# Altium PCB Main_PCB.PcbDoc
Units mm, origin at the board's own origin, x right, y up, seen from the top; angles counter-clockwise.
Board outline 160 x 100 mm, 2 copper layers (Top Layer, Bottom Layer), stack 1.569 mm thick; 46 components, 26 nets, 123 pads, 0 vias.
Unrouted connection lines stored in the file: 96.
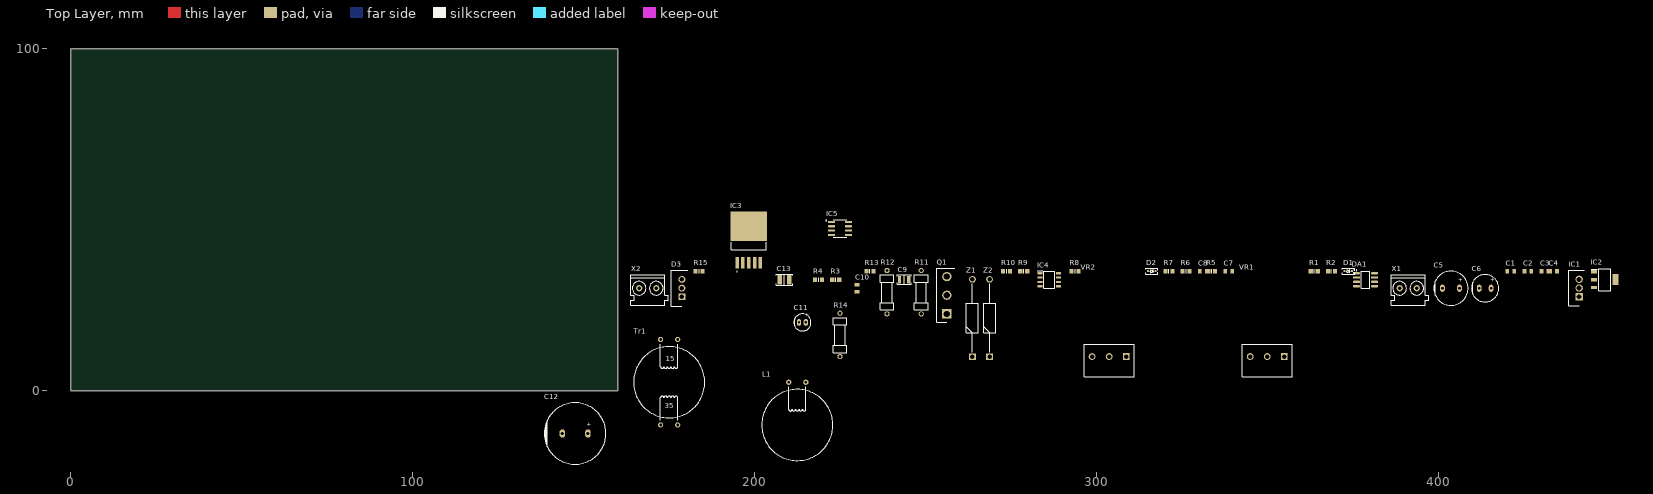
[diagram p0: Top Layer view]
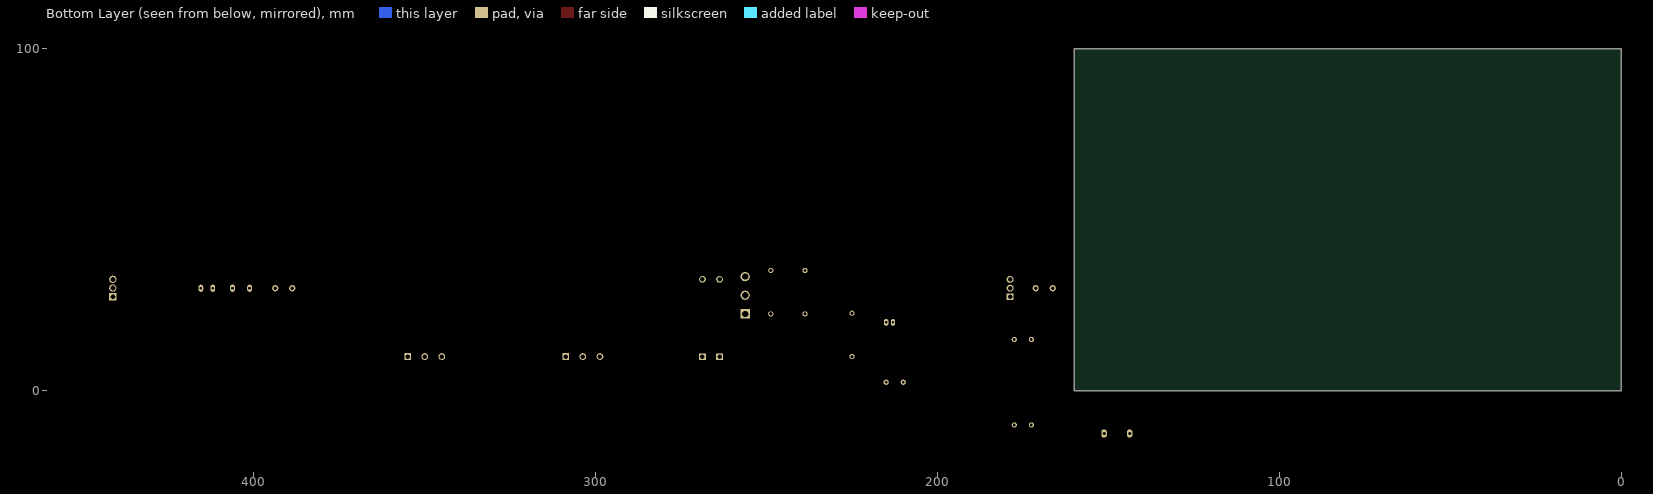
[diagram p1: Bottom Layer view, seen from below]

## Layer stack, top to bottom
Top Solder: solder mask 0.01, Solder Resist, Dk 3.5
Top Layer: signal copper 0.035
Dielectric 1: core 1.4986, Core-043, Dk 4.3
Bottom Layer: signal copper 0.035
Bottom Solder: solder mask 0.01, Solder Resist, Dk 3.5

## Board outline
0,0 0,100 160,100 160,0

## Design rules (kind name [scope] priority, off if disabled: settings)
Clearance [All] p1: gap=0.254 ignorepadtopadclearanceinfootprint=FALSE except(0: Arc-Hole Track-Hole SMDPad-Hole THPad-Hole Via-Hole Fill-Hole Poly-Hole Region-Hole Text-Hole)
PolygonConnect [All] p1: connectstyle=Relief reliefconductorwidth=0.254 reliefentries=4 polygonreliefangle="90 Angle" airgapwidth=0.254
RoutingVias [All] p1: holewidth=0.711 width=1.27 viastyle="Through Hole" minholewidth=0.711 minwidth=1.27 maxholewidth=0.711 maxwidth=1.27
SolderMaskExpansion [All] p1: expansion=0.102 istentingtop=FALSE
Width [All] p1: maxlimit=0.254 minlimit=0.254 preferedwidth=0.254
30 further rules are at their usual default settings.

## Components (designator, comment, footprint, x,y, rotation, side; value= is the part's Value field where it differs from the comment)
C1 "0,1 мкФ" CAPC2012L-С0805 421.25,35 r0 top
C2 "0,1 мкФ" CAPC2012L-С0805 426.25,35 r0 top
C3 "0,1 мкФ" CAPC2012L-С0805 431.25,35 r0 top
C4 "0,1 мкФ" CAPC2012L-С0805 433.75,35 r0 top
C5 "470µF" "CAP TH ALUM ELEC D10.00mm S5.00mm H10.50mm" 403.75,30 r0 top
C6 "100µF" "CAP TH ALUM ELEC D8.00mm S3.50mm H12.50mm" 413.75,30 r0 top
C7 "0,1 мкФ" CAPC2012L-С0805 338.75,35 r0 top
C8 "0,1 мкФ" CAPC2012L-С0805 331.25,35 r0 top
C9 "1 µF" "CAP FILM 1210" 243.75,32.5 r0 top
C10 "0,1 мкФ" CAPC2012L-С0805 230,30 r90 top
C11 "10µF" "CAP TH ALUM ELEC D5.00mm S2.00mm H11.00mm" 214,20 r0 top
C12 "2200µF" "CAP TH ALUM ELEC D18.00mm S7.50mm H42.00mm" 147.5,-12.5 r0 top
C13 "0.1 µF" "CAP 1210_3225 - 1MM" 208.75,32.5 r0 top
D1 "1N4148WS" SOD323F 373.75,35 r0 top
D2 "1N4148WS" SOD323F 316.25,35 r0 top
D3 "MBR40250TG" TO254P483X1010X2035-3P 178.75,27.5 r90 top
DA1 "LM358" SOIC127P600-8BM 378.75,32.5 r0 top
IC1 "L7815CP" TO255P460X1020X2030-3P 441.25,27.5 r90 top
IC2 "LM7805MPX_NOPB" SOT230P700X180-4N 448.75,32.5 r0 top
IC3 "LM2576" LM2576 198.3,48.1 r90 top
IC4 "ACS712ELCTR-05B-T" SOIC127P600X175-8N 286.25,32.5 r0 top
IC5 "UCC27322" SOIC127P599X175-8N 225,47.5 r0 top
L1 "200uH" Inductor 212.5,-10 r0 top
Q1 "IRFP250N" TO545P530X1560X2460-3P 256.25,22.5 r90 top
R1 "1кОм" RESC2012N 363.75,35 r0 top
R2 "1кОм" RESC2012N 368.75,35 r0 top
R3 "1кОм" RESC2012N 223.75,32.5 r0 top
R4 "1кОм" RESC2012N 218.75,32.5 r0 top
R5 "1кОм" RESC2012N 333.75,35 r0 top
R6 "1кОм" RESC2012N 326.25,35 r0 top
R7 "1кОм" RESC2012N 321.25,35 r0 top
R8 "1кОм" RESC2012N 293.75,35 r0 top
R9 "1кОм" RESC2012N 278.75,35 r0 top
R10 "1кОм" RESC2012N 273.75,35 r0 top
R11 "1кОм" MLT05WT 248.75,22.5 r90 top
R12 "1кОм" MLT05WT 238.75,22.5 r90 top
R13 "1кОм" RESC2012N 233.75,35 r0 top
R14 "1кОм" MLT05WT 225,10 r90 top
R15 "1кОм" RESC2012N 183.75,35 r0 top
Tr1 "15:35" Transformer 175,2.5 r0 top
VR1 "50 кОм" PDB181K220K104B 355,10 r90 top
VR2 "50 кОм" PDB181K220K104B 308.75,10 r90 top
X1 "KLEMMNIK2" KLEMNIK2 388.75,30 r0 top
X2 "KLEMMNIK2" KLEMNIK2 166.25,30 r0 top
Z1 "1N5355B" DIOAD2260W109L864D349 263.75,10 r90 top
Z2 "1N5355B" DIOAD2260W109L864D349 268.75,10 r90 top

## Footprints (in the part's own frame and the unit in brackets; to place one, negate y for a bottom-side part, rotate by r counter-clockwise, add the part's x,y. Pads: shape width x height; smd on the part's side, far side on the other; paste and mask are expansions set on the pad)
"CAP 1210_3225 - 1MM" [mm] "Chip Capacitor, 2-Leads, Body 3.20x2.50mm, IPC Medium Density"
  rect 1.3x2.7 smd: 1(-1.4,0) 2(1.4,0)
  silkscreen extent -2.37,-1.63 2.37,1.63, body extent -1.6,-1.25 1.6,1.25, height 1
"CAP FILM 1210" [mm] "G2, Film Capacitor PPS, 2-Leads, Body 3.20x2.50mm, IPC Medium Density"
  rect 0.9x2.3 smd: 1(-1.35,0) 2(1.35,0)
  silkscreen extent -2.02,-1.38 2.02,1.38, body extent -1.6,-1.25 1.6,1.25, height 1.6
"CAP TH ALUM ELEC D5.00mm S2.00mm H11.00mm" [mm] "5mm Diameter 2mm Lead Spacing Aluminum Electrolytic Capacitors Radial, Can"
  oval 1.3x1.95 hole 0.7: 1(1,0) 2(-1,0)
  silkscreen extent -2.5,-2.5 2.5,2.5, body extent -2.51,-2.5 2.5,2.5, height 11
"CAP TH ALUM ELEC D8.00mm S3.50mm H12.50mm" [mm] "8mm Diameter 3.5mm Lead Spacing Aluminum Electrolytic Capacitors Radial, Can"
  oval 1.4x2.1 hole 0.8: 1(1.75,0) 2(-1.75,0)
  silkscreen extent -4,-4 4,4, body extent -4.01,-4 4,4, height 12.5
"CAP TH ALUM ELEC D10.00mm S5.00mm H10.50mm" [mm] "10mm Diameter 5mm Lead Spacing Aluminum Electrolytic Capacitors Radial, Can"
  oval 1.4x2.1 hole 0.8: 1(2.5,0) 2(-2.5,0)
  silkscreen extent -5,-5 5,5, body extent -5.01,-5 5,5, height 10.5
"CAP TH ALUM ELEC D18.00mm S7.50mm H42.00mm" [mm] "18mm Diameter 7.5mm Lead Spacing Aluminum Electrolytic Capacitors Radial, Can"
  oval 1.6x2.4 hole 1: 1(3.75,0) 2(-3.75,0)
  silkscreen extent -9,-9 9,9, body extent -9,-9 9,9, height 42
CAPC2012L-С0805 [mm] "Chip Capacitor, Body 2.0x1.3mm, IPC High Density"
  rect 1.1x1.4 smd: 1(-1.016,0) 2(1.016,0)
  body extent -1,-0.62 1,0.63, height 0.78
DIOAD2260W109L864D349 [mm]
  rect 1.95x1.95 hole 1.3: 1(0,0)
  round 1.95 hole 1.3: 2(22.6,0)
  silkscreen extent 1.33,-1.75 21.27,1.75, body extent -0.55,-1.84 23.14,1.84, height 3.67
Inductor [mil]
  round 60 hole 30: 1(-98.43,492.13) 2(98.43,492.13)
  silkscreen extent -410,-410 410,440, body extent -417,-417 417,417, height 256
KLEMNIK2 [mm]
  round 1.8 hole 1.1: 1(0,0) 2(5,0)
  silkscreen extent -2.5,-5 8.5,4, body extent -2.5,-4.05 8.1,4.25, height 9.99
LM2576 [mm]
  rect 3.4x1 smd paste-0.05 mask+0.07: 1(-10.6,3.4) 2(-10.6,1.7) 3(-10.6,0) 4(-10.6,-1.7) 5(-10.6,-3.4)
  rect 8.6x10.7 smd paste-0.05 mask+0.07: 6(0,0)
  silkscreen extent -13.3,-5.08 -4.62,5.08, body extent -10.99,-5.08 3.37,5.08, height 4.65
MLT05WT [mil]
  round 60 hole 39.37 unplated: 1(0,0) 2(500,0)
  silkscreen extent 45,-79 450,79, body extent -15,-74 515,74, height 153
PDB181K220K104B [mm]
  rect 1.98x1.98 hole 1.32: 1(0,0)
  round 1.98 hole 1.32: 2(0,5) 3(0,10)
  silkscreen extent -5.9,-2.3 3.6,12.3, body extent -5.58,-3.5 18.92,13.49, height 21.2
RESC2012N [mm] "Chip Resistor, Body 2.0x1.3mm, IPC Medium Density"
  rect 1.2x1.4 smd: 1(-1.016,0) 2(1.016,0)
  silkscreen extent 0,-0.6 0,0.6, body extent -1,-0.62 1,0.63, height 0.78
SOD323F [mm] "SODFL, 2-Leads, Body 1.25x2.50mm, IPC Medium Density"
  rect 0.6x0.6 smd: 1(-1.1,0) 2(1.1,0)
  silkscreen extent -1.78,-0.89 1.78,0.89, body extent -1.25,-0.62 1.25,0.63, height 0.8
SOIC127P599X175-8N [mm]
  rrect25% 1.97x0.6 smd: 1(-2.47,1.905) 2(-2.47,0.635) 3(-2.47,-0.635) 4(-2.47,-1.905) 5(2.47,-1.905) 6(2.47,-0.635) 7(2.47,0.635) 8(2.47,1.905)
  silkscreen extent -4.14,-2.52 1.95,2.52, body extent -3,-2.45 3,2.45, height 1.75
SOIC127P600-8BM [mm] "SOIC, 8-Leads, Body 4.9x3.9mm, Pitch 1.27mm, IPC Low Density"
  oval 2.1x0.7 smd: 1(-2.65,1.905) 2(-2.65,0.635) 3(-2.65,-0.635) 4(-2.65,-1.905) 5(2.65,-1.905) 6(2.65,-0.635) 7(2.65,0.635) 8(2.65,1.905)
  silkscreen extent -2.77,-2.5 1.2,2.93, body extent -3.02,-2.45 2.97,2.45, height 1.75
SOIC127P600X175-8N [mm]
  rect 1.525x0.65 smd: 1(-2.712,1.905) 2(-2.712,0.635) 3(-2.712,-0.635) 4(-2.712,-1.905) 5(2.712,-1.905) 6(2.712,-0.635) 7(2.712,0.635) 8(2.712,1.905)
  silkscreen extent -3.47,-2.45 1.6,2.58, body extent -3,-2.45 3,2.45, height 1.75
SOT230P700X180-4N [mm]
  rect 1.75x0.95 smd: 1(-3.15,2.3) 2(-3.15,0) 3(-3.15,-2.3)
  rect 1.75x3.2 smd: 4(3.15,0)
  silkscreen extent -4.03,-3.25 1.75,3.25, body extent -3.5,-3.25 3.5,3.25, height 1.68
TO254P483X1010X2035-3P [mm]
  rect 2.01x2.01 hole 1.34: 1(0,0)
  round 2.01 hole 1.34: 2(2.54,0) 3(5.08,0)
  silkscreen extent -2.73,-1.74 7.81,3.1, body extent -2.51,-1.74 7.59,3.1, height 18.56
TO255P460X1020X2030-3P [mm]
  rect 2.13x2.13 hole 1.42: 1(0,0)
  round 2.13 hole 1.42: 2(2.55,0) 3(5.1,0)
  silkscreen extent -2.65,-1.5 7.75,3.1, body extent -2.55,-1.5 7.65,3.1, height 19.4
TO545P530X1560X2460-3P [mm]
  rect 2.715x2.715 hole 1.81: 1(0,0)
  round 2.715 hole 1.81: 2(5.45,0) 3(10.9,0)
  silkscreen extent -2.5,-2.3 13.4,3, body extent -2.35,-2.3 13.25,3, height 24
Transformer [mil]
  round 60 hole 30: 1(-98.43,492.13) 2(98.43,492.13) 3(98.43,-492.13) 4(-98.43,-492.13)
  silkscreen extent -410,-440 410,440, body extent -417,-417 417,417, height 256

## Part data
C1 C2 C3 C4 C7 C8 C10: library part C0805, "планарный конденсатор"
C5: library part 25WA470MEFCT810X9, "CAP ALUM 470UF 20% 25V RADIAL", Device Package="Radial, Can", Lifetime @ Temp.="2000 Hrs @ 85°C", manufacturer=Rubycon, Operating Temperature="-40°C ~ 85°C", Ripple Current @ Low Frequency="460mA @ 120Hz", Supplier Part Number 1=1189-3717-1-ND, Tolerance=±20%, Voltage - Rated=25V, Applications="General Purpose", Capacitance=470µF, componentlink1description=Datasheet, componentlink1url=http://www.rubycon.co.jp/en/catalog/e_pdfs/aluminum/e_wa.pdf, componentlink2description="DigiKey Link", componentlink2url=http://digikey.com/product-detail/en/rubycon/25WA470MEFCT810X9/1189-3717-1-ND/6599186, Height - Seated (Max)="0.413\" (10.50mm)", lastupdated="02.09.2020 1:26:22", Lead Spacing="0.197\" (5.00mm)", Lifecycle Status=Active, Minimum Order=1, Mounting Type="Through Hole", Package / Case="Radial, Can", packaging=TapeAndBox, Part Number=25WA470MEFCT810X9, Part Status=Active, partid=9499, Polarization=Polar, price=0.17, series=WA, Size / Dimension="0.394\" Dia (10.00mm)", Supplier 1=DigiKey
C6: library part UKL1E101KPDANATD, "CAP ALUM 100UF 20% 25V RADIAL", Device Package="Radial, Can", Lifetime @ Temp.="1000 Hrs @ 105°C", manufacturer=Nichicon, Operating Temperature="-40°C ~ 105°C", Ripple Current @ High Frequency="420mA @ 10kHz", Ripple Current @ Low Frequency="280mA @ 120Hz", Supplier Part Number 1=493-15360-1-ND, Tolerance=±10%, Voltage - Rated=25V, Applications="General Purpose", Capacitance=100µF, componentlink1description=Datasheet, componentlink1url=http://nichicon-us.com/english/products/pdfs/e-ukl.pdf, componentlink2description="DigiKey Link", componentlink2url=http://digikey.com/product-detail/en/nichicon/UKL1E101KPDANATD/493-15360-1-ND/6555998, Height - Seated (Max)="0.492\" (12.50mm)", lastupdated="07.09.2020 5:24:52", Lead Spacing="0.138\" (3.50mm)", Lifecycle Status=Active, Minimum Order=1, Mounting Type="Through Hole", Package / Case="Radial, Can", packaging=TapeAndBox, Part Number=UKL1E101KPDANATD, Part Status=Active, partid=7205, Polarization=Polar, price=0.16, series=UKL, Size / Dimension="0.315\" Dia (8.00mm)", Supplier 1=DigiKey
C9: library part 35MU105MB13225, "CAP FILM 1UF 20% 35VDC 1210", Device Package="1210 (3225 Metric)", Dielectric Material="Acrylic, Metallized", manufacturer=Rubycon, Operating Temperature="-55°C ~ 125°C", Supplier Part Number 1=1189-2529-1-ND, Tolerance=±20%, Voltage Rating - DC=35V, Applications="DC Link, DC Filtering", Capacitance="1 µF", componentlink1description=Datasheet, componentlink1url=http://www.rubycon.co.jp/en/catalog/e_pdfs/pmlcap/e_MU.pdf, componentlink2description="DigiKey Link", componentlink2url=https://www.digikey.com/en/products/detail/rubycon/35MU105MB13225/4969535, Height - Seated (Max)="0.063\" (1.60mm)", lastupdated="01.11.2023 20:43:30", Lifecycle Status=Active, Minimum Order=1, Mounting Type="Surface Mount", Package / Case="1210 (3225 Metric)", packaging=TapeAndReel, Part Number=35MU105MB13225, Part Status=Active, price=2.41, series="PMLCAP®, MU", Size / Dimension="0.126\" L x 0.098\" W (3.20mm x 2.50mm)", Supplier 1=DigiKey, Termination="Solder Pads"
C11: library part UPW1C100MDD, "CAP ALUM 10UF 20% 16V RADIAL", Device Package="Radial, Can", Lifetime @ Temp.="2000 Hrs @ 105°C", manufacturer=Nichicon, Operating Temperature="-55°C ~ 105°C", Ripple Current @ High Frequency="180mA @ 100kHz", Ripple Current @ Low Frequency="54mA @ 120Hz", Supplier Part Number 1=493-1767-ND, Tolerance=±20%, Voltage - Rated=16V, Applications="General Purpose", Capacitance=10µF, componentlink1description=Datasheet, componentlink1url=http://nichicon-us.com/english/products/pdfs/e-upw.pdf, componentlink2description="DigiKey Link", componentlink2url=http://digikey.com/product-detail/en/nichicon/UPW1C100MDD/493-1767-ND/589508, Height - Seated (Max)="0.433\" (11.00mm)", Impedance="600 mOhms", lastupdated="04.09.2020 23:28:56", Lead Spacing="0.079\" (2.00mm)", Lifecycle Status=Active, Minimum Order=1, Mounting Type="Through Hole", Package / Case="Radial, Can", packaging=Bulk, Part Number=UPW1C100MDD, Part Status=Active, partid=21402, Polarization=Polar, price=0.26, series=UPW, Size / Dimension="0.197\" Dia (5.00mm)", Supplier 1=DigiKey
C12: library part 50RX302200M18X40, "CAP ALUM 2200UF 20% 50V RADIAL", Device Package="Radial, Can", Lifetime @ Temp.="4000 Hrs @ 130°C", manufacturer=Rubycon, Operating Temperature="-40°C ~ 130°C", Ratings=AEC-Q200, Ripple Current @ High Frequency="2.8A @ 100kHz", Ripple Current @ Low Frequency="2.24A @ 120Hz", Supplier Part Number 1=1189-1410-ND, Tolerance=±20%, Voltage - Rated=50V, Applications=Automotive, Capacitance=2200µF, componentlink1description=Datasheet, componentlink1url=http://www.rubycon.co.jp/en/catalog/e_pdfs/aluminum/e_rx30.pdf, componentlink2description="DigiKey Link", componentlink2url=http://digikey.com/product-detail/en/rubycon/50RX302200M18X40/1189-1410-ND/3134366, Height - Seated (Max)="1.654\" (42.00mm)", Impedance="29 mOhms", lastupdated="02.09.2020 1:33:35", Lead Spacing="0.295\" (7.50mm)", Lifecycle Status=Active, Minimum Order=1, Mounting Type="Through Hole", Package / Case="Radial, Can", packaging=Bulk, Part Number=50RX302200M18X40, Part Status=Active, partid=9389, Polarization=Polar, price=3.85, series=RX30, Size / Dimension="0.709\" Dia (18.00mm)", Supplier 1=DigiKey
C13: library part 1210E104K101KHT, "CAP CER 0.1UF 100V 1210", Device Package="1210 (3225 Metric)", manufacturer="Knowles Novacap", Operating Temperature="-55°C ~ 200°C", Supplier Part Number 1=1763-1065-1-ND, Tolerance=±10%, Voltage - Rated=100V, Applications="General Purpose", Capacitance="0.1 µF", componentlink1description=Datasheet, componentlink1url=https://www.knowlescapacitors.com/getattachment/2d1d9bca-ba82-47f9-be7e-f7ac57875616/High-Temp.aspx, componentlink2description="DigiKey Link", componentlink2url=https://www.digikey.com/en/products/detail/knowles-novacap/1210E104K101KHT/7304176, Features="High Temperature", lastupdated="01.11.2023 19:41:18", Lifecycle Status=Active, Minimum Order=1, Mounting Type="Surface Mount, MLCC", Package / Case="1210 (3225 Metric)", packaging=TapeAndReel, Part Number=1210E104K101KHT, Part Status=Active, partid=24785, price=1.89, series=-, Size / Dimension="0.125\" L x 0.100\" W (3.18mm x 2.54mm)", Supplier 1=DigiKey, Thickness (Max)="0.065\" (1.65mm)"
D1 D2: "DIODE GEN PURP 75V 150MA SOD323F", Current - Average Rectified (Io)=150mA, Current - Reverse Leakage @ Vr="5µA @ 75V", manufacturer="ON Semiconductor", Operating Temperature - Junction="150°C (Max)", Package / Case="SC-90, SOD-323F", Supplier Device Package=SOD-323F, Supplier Part Number 1=1N4148WSFSCT-ND, Voltage - DC Reverse (Vr) (Max)=75V, Voltage - Forward (Vf) (Max) @ If="1V @ 10mA", componentlink1description=Datasheet, componentlink1url=https://www.onsemi.com/pub/Collateral/1N914BWS-D.pdf, componentlink2description="DigiKey Link", componentlink2url=http://digikey.com/product-detail/en/on-semiconductor/1N4148WS/1N4148WSFSCT-ND/1873821, Diode Type=Standard, lastupdated="01.11.2023 20:26:51", Lifecycle Status=Active, Minimum Order=1, Mounting Type="Surface Mount", packaging=TapeAndReel, Part Number=1N4148WS, Part Status=Active, partid=1158, price=0.03, Reverse Recovery Time (trr)=4ns, series=-, Speed="Small Signal =< 200mA (Io), Any Speed", Supplier 1=DigiKey
D3: "Diode", Manufacturer_Name=onsemi, Mouser Part Number=863-MBR40250TG, Arrow Part Number=MBR40250TG, Arrow Price/Stock=https://www.arrow.com/en/products/mbr40250tg/on-semiconductor?region=nac, Datasheet Link=http://www.onsemi.com/pub/Collateral/MBR40250-D.PDF, Height=4.83mm, Manufacturer_Part_Number=MBR40250TG, Mouser Price/Stock=https://www.mouser.co.uk/ProductDetail/onsemi/MBR40250TG?qs=3JMERSakebr9LpXNBMS%2FzA%3D%3D
DA1: "OP"
IC1: "Integrated Circuit", Manufacturer_Name=STMicroelectronics, Mouser Part Number=511-L7815CP, Arrow Part Number=L7815CP, Arrow Price/Stock=https://www.arrow.com/en/products/l7815cp/stmicroelectronics?region=europe, Datasheet Link=http://www.st.com/web/en/resource/technical/document/datasheet/CD00000444.pdf, Height=4.6mm, Manufacturer_Part_Number=L7815CP, Mouser Price/Stock=https://www.mouser.co.uk/ProductDetail/STMicroelectronics/L7815CP?qs=%252BX2uje6VeKVI9cfwuCNq4A%3D%3D
IC2: "Integrated Circuit", Arrow Part Number=LM7805MPX/NOPB, Manufacturer_Name="Texas Instruments", Mouser Part Number=595-LM7805MPX/NOPB, Arrow Price/Stock=https://www.arrow.com/en/products/lm7805mpxnopb/texas-instruments?region=nac, Datasheet Link=https://www.arrow.com/en/products/lm7805mpxnopb/texas-instruments, Height=1.8mm, Manufacturer_Part_Number=LM7805MPX/NOPB, Mouser Price/Stock=https://www.mouser.co.uk/ProductDetail/Texas-Instruments/LM7805MPX-NOPB?qs=gO6GG99qvRCSwIVAoVKHPw%3D%3D
IC3: library part LM2576-ADJ, "Buck-boost converter"
IC4: "Integrated Circuit", Manufacturer_Name="Sharp Microelectronics", Datasheet Link=https://www.allegromicro.com/~/media/Files/Datasheets/ACS712-Datasheet.ashx, Height=1.75mm, Manufacturer_Part_Number=ACS712ELCTR-05B-T
IC5: "Single 9-A High-Speed Low-Side Mosfet Driver With Enable"
L1: library part Inductor
Q1: "MOSFET (N-Channel)", Manufacturer_Name=Infineon, Mouser Part Number=N/A, Datasheet Link=https://www.infineon.com/dgdl/Infineon-IRFP250N-DataSheet-v01_01-EN.pdf?fileId=5546d462533600a4015356288b8b1fde, Height=5.3mm, Manufacturer_Part_Number=IRFP250N, Mouser Price/Stock=https://www.mouser.co.uk/ProductDetail/Infineon-IR/IRFP250N?qs=Gkr2N%2F2q3o3iFaFA442Z6g%3D%3D
R1 R2 R3 R4 R5 R6 R7 R8 R9 R10 R13 R15: library part R0805, "планарный резистор"
R11 R12 R14: library part MLT05W, "резистор 0,5W"
Tr1: library part Transformer
VR1 VR2: library part PDB181-K420K-105A2, "Variable Resistor", Manufacturer_Name=Bourns, Mouser Part Number=652-PDB181K420K105A2, Arrow Part Number=PDB181-K420K-105A2, Arrow Price/Stock=https://www.arrow.com/en/products/pdb181-k420k-105a2/bourns?region=nac, Datasheet Link=https://www.bourns.com/docs/product-datasheets/PDB18.pdf, Height=16.5mm, Manufacturer_Part_Number=PDB181-K420K-105A2, Mouser Price/Stock=https://www.mouser.co.uk/ProductDetail/Bourns/PDB181-K420K-105A2?qs=HVbQlW5zcXUfmN1nKSXlOQ%3D%3D
Z1 Z2: "Zener Diode", Manufacturer_Name=Galaxy, Datasheet Link=https://www.onsemi.com/pdf/datasheet/1n5333b-d.pdf, Manufacturer_Part_Number=1N5355B

## Nets (pads, with @x,y where several pads share a name; then routed paths per layer and width w, separated by ;. In a path a pad name is that pad's centre, name@x,y a point inside that pad or via, vN(x,y) a via of type N, cw(c..) or ccw(c..) an arc to the next point about the centre after c; other vN are vias at no path point)
GND: C1.1 C2.1 C3.1 C4.1 C5.2 C6.2 C10.1 C11.2 C12.2 C13.1 D3.1 D3.3 DA1.4 IC1.2 IC2.2 IC2.4 IC3.3 IC3.5 IC4.5 IC5.4 IC5.5 R1.2 R2.2 R4.2 R8.2 R10.2 R14.1 R15.2 Tr1.2 VR1.1 X1.1 X2.2
NetC7_1: C7.1 R5.1
NetC7_2: C7.2 D1.1 DA1.1 R2.1
NetC8_1: C8.1 R6.1
NetC8_2: C8.2 D2.1 DA1.7 R8.1
NetC9_1: C9.1 IC5.6 IC5.7
NetC9_2: C9.2 Tr1.1
NetC10_2: C10.2 C11.1 DA1.5 IC4.7
NetC12_1: C12.1 C13.2 IC4.1 IC4.2 L1.2 R13.1 R14.2
NetD1_2: D1.2 D2.2 IC3.4 R1.1
NetD3_2: D3.2 L1.1 Q1.3 R12.1 Tr1.4 Z2.1
NetDA1_2: DA1.2 R5.2 VR1.2
NetDA1_3: DA1.3 R13.2 R15.1
NetDA1_6: DA1.6 R6.2 VR2.2
NetIC3_2: IC3.2 R3.2 R4.1
NetIC4_3: IC4.3 IC4.4 X2.1
NetIC4_6: IC4.6 R9.2
NetIC5_2: IC5.2 R3.1
NetQ1_1: Q1.1 R11.2 R12.2 Z1.1
NetR7_1: R7.1 VR2.3
NetR10_1: R10.1 VR2.1
NetR11_1: R11.1 Tr1.3
NetZ1_2: Z1.2 Z2.2
VCC5: DA1.8 IC2.3 IC4.8 R7.2 R9.1 VR1.3
VCC15: C2.2 C3.2 C4.2 C6.1 IC1.3 IC2.1 IC3.1 IC5.1 IC5.3 IC5.8
VCC60: C1.2 C5.1 IC1.1 Q1.2 X1.2
pads on no net: IC3.6

## Text inside footprints (layer, text, board x,y; h text height)
C5: Top Overlay "+" at 405.95,31.4 h2
C6: Top Overlay "+" at 415.2,31.4 h2
C11: Top Overlay "+" at 214.7,21.25 h2
C12: Top Overlay "+" at 150.95,-10.8 h2
Tr1: Top Overlay "15" at 173.984,8.596 h1.52; Top Overlay "35" at 173.73,-5.12 h1.52